# Altium PCB MACHIN1527.PcbDoc
Units mil, origin at the board's own origin, x right, y up, seen from the top; angles counter-clockwise.
Board outline 1897.64 x 1794.29 mil, 2 copper layers (Top Layer, Bottom Layer); 40 components, 0 nets, 94 pads, 12 vias.
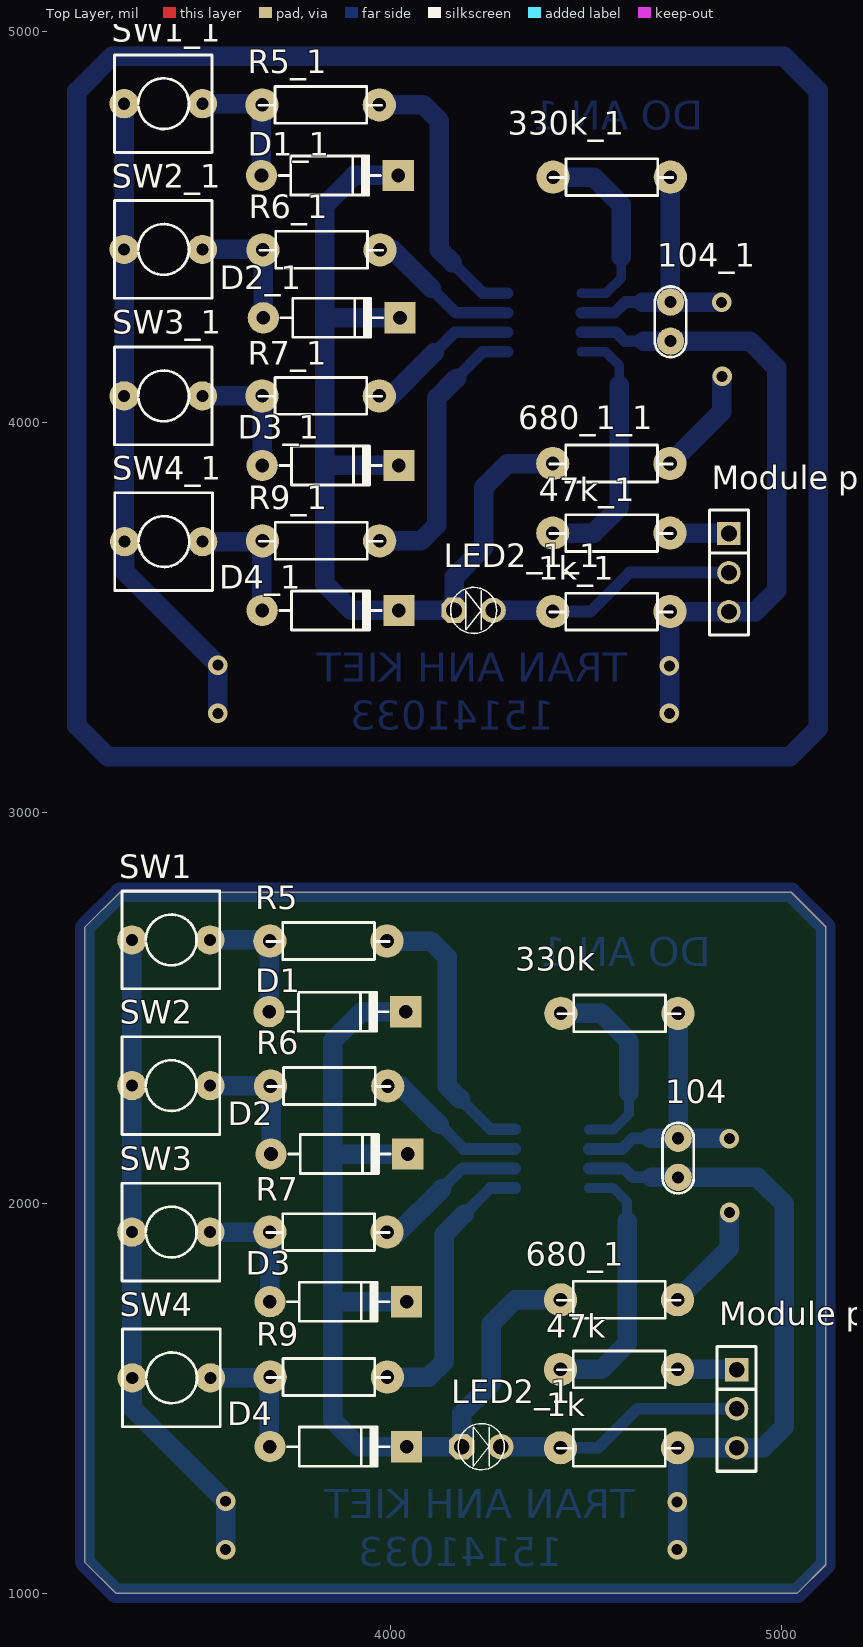
[diagram p0: Top Layer view]
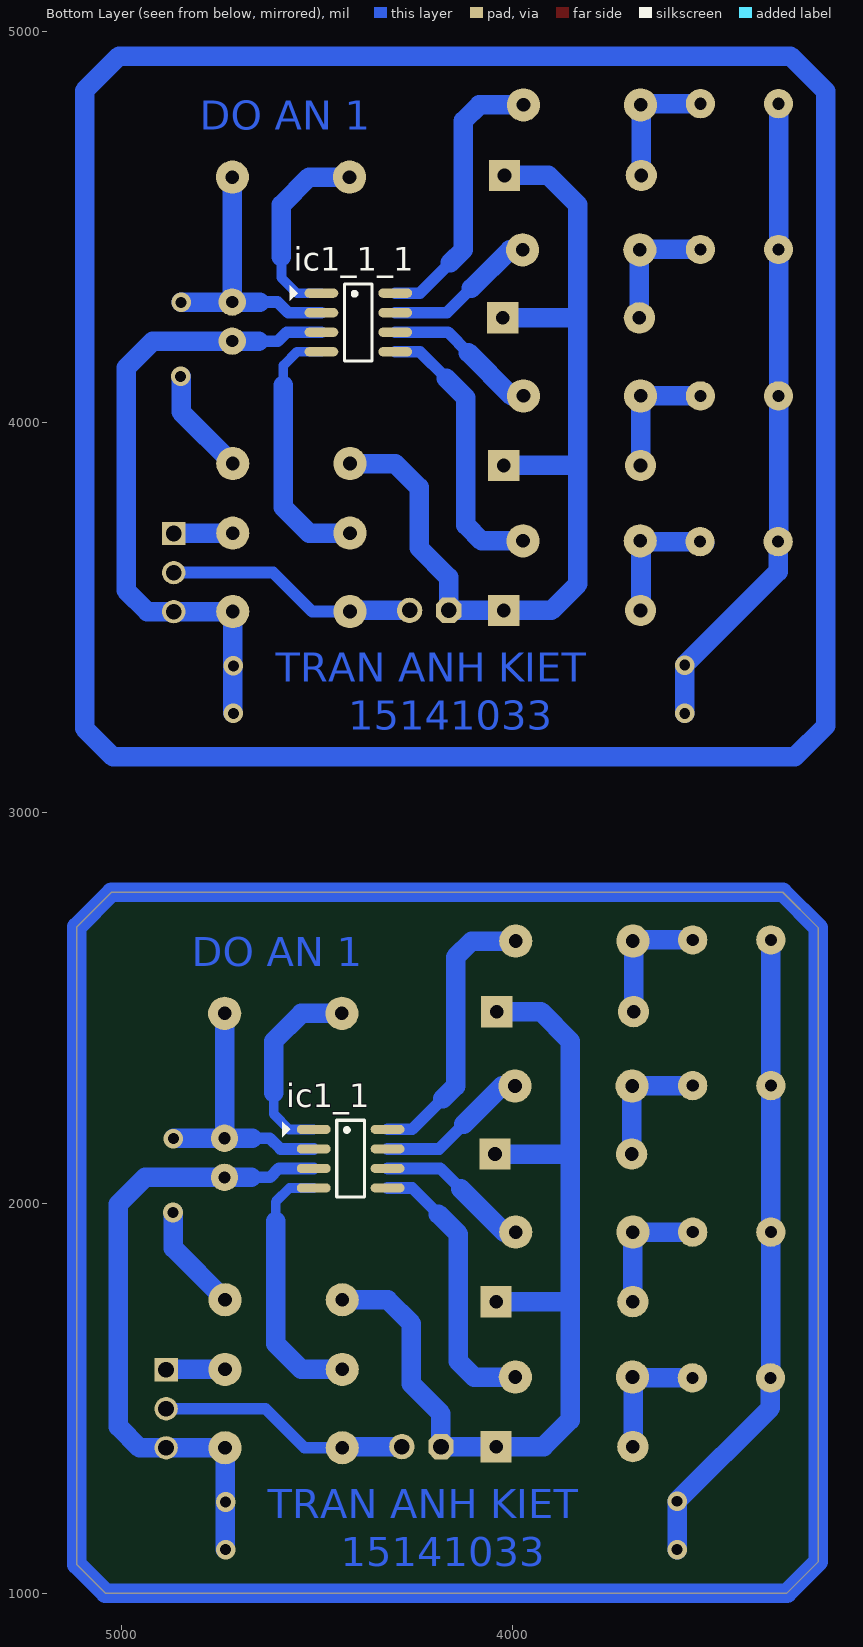
[diagram p1: Bottom Layer view, seen from below]

## Layer stack, top to bottom
Top Layer: signal copper 1.4
Dielectric: dielectric 12.6, FR-4, Dk 4.8
Bottom Layer: signal copper 1.4

## Board outline
3216.61,1081.97 3296.34,1002.24 5041.42,1002.24 5114.25,1075.08 5114.25,2707.95 5025.67,2796.54 3307.17,2796.54 3216.61,2705.98

## Design rules (kind name [scope] priority, off if disabled: settings)
Clearance [All] p1: gap=10
PolygonConnect [All] p1: connectstyle=Relief reliefconductorwidth=10 reliefentries=4 polygonreliefangle="90 Angle"
RoutingVias [All] p1: holewidth=28 width=50 viastyle="Through Hole" minholewidth=28 minwidth=50 maxholewidth=28 maxwidth=50
SilkscreenOverComponentPads [All] p1: minsilkscreentomaskgap=10
SolderMaskExpansion [All] p1: expansion=4
Width [All] p1: maxlimit=10 minlimit=10 preferedwidth=10
27 further rules are at their usual default settings.

## Components (designator, comment, footprint, x,y, rotation, side; value= is the part's Value field where it differs from the comment)
1k "Res" RES-1/4W-SMALL 4574.88,1374.29 r0 top
1k_1 "Res" RES-1/4W-SMALL 4555.2,3515.04 r0 top (schematic designator 1k)
47k "Res" RES-1/4W-SMALL 4574.88,1575.08 r0 top
47k_1 "Res" RES-1/4W-SMALL 4555.2,3715.83 r0 top (schematic designator 47k)
104 "104" CN1 4736.3,2166.61 r270 top
104_1 "104" CN1 4716.61,4307.36 r270 top (schematic designator 104)
330k "Res" RES-1/4W-SMALL 4575.87,2486.5 r0 top
330k_1 "Res" RES-1/4W-SMALL 4556.18,4627.24 r0 top (schematic designator 330k)
680_1 "Res" RES-1/4W-SMALL 4574.88,1753.23 r0 top (schematic designator 680)
680_1_1 "Res" RES-1/4W-SMALL 4555.2,3893.98 r0 top (schematic designator 680)
D1 "1N4007" D1A 3689.06,2490.83 r180 top
D1_1 "1N4007" D1A 3669.37,4631.58 r180 top (schematic designator D1)
D2 "1N4007" D1A 3693.98,2126.26 r180 top
D2_1 "1N4007" D1A 3674.29,4267.01 r180 top (schematic designator D2)
D3 "1N4007" D1A 3691.02,1748.31 r180 top
D3_1 "1N4007" D1A 3671.34,3889.06 r180 top (schematic designator D3)
D4 "1N4007" D1A 3691.02,1377.24 r180 top
D4_1 "1N4007" D1A 3671.34,3517.99 r180 top (schematic designator D4)
ic1_1 "ev1527" SO-8 4413.46,2114.45 r180 bottom (schematic designator ic1)
ic1_1_1 "ev1527" SO-8 4393.78,4255.2 r180 bottom (schematic designator ic1)
LED2_1 "LED" LED-3MM-YELLOW 4182.17,1377.24 r0 top (schematic designator LED2)
LED2_1_1 "LED" LED-3MM-YELLOW 4162.48,3517.99 r0 top (schematic designator LED2)
"Module phát" "JP3" JP3-C1T 4885.91,1574.09 r270 top
"Module phát_1" "JP3" JP3-C1T 4866.22,3714.84 r270 top (schematic designator "Module phát")
R5 "Res" RES-1/4W-SMALL 3830.79,2671.54 r0 top
R5_1 "Res" RES-1/4W-SMALL 3811.1,4812.28 r0 top (schematic designator R5)
R6 "Res" RES-1/4W-SMALL 3832.76,2300.47 r0 top
R6_1 "Res" RES-1/4W-SMALL 3813.07,4441.22 r0 top (schematic designator R6)
R7 "Res" RES-1/4W-SMALL 3830.79,1926.46 r0 top
R7_1 "Res" RES-1/4W-SMALL 3811.1,4067.2 r0 top (schematic designator R7)
R9 "Res" RES-1/4W-SMALL 3831.77,1555.39 r0 top
R9_1 "Res" RES-1/4W-SMALL 3812.09,3696.14 r0 top (schematic designator R9)
SW1 "" SW2 3537.7,2674.46 r180 top
SW1_1 "" SW2 3518.01,4815.21 r180 top (schematic designator SW1)
SW2 "" SW2 3537.7,2301.43 r180 top
SW2_1 "" SW2 3518.01,4442.18 r180 top (schematic designator SW2)
SW3 "" SW2 3537.7,1926.43 r180 top
SW3_1 "" SW2 3518.01,4067.18 r180 top (schematic designator SW3)
SW4 "" SW2 3538.68,1553.4 r180 top
SW4_1 "" SW2 3519,3694.15 r180 top (schematic designator SW4)

## Footprints (in the part's own frame and the unit in brackets; to place one, negate y for a bottom-side part, rotate by r counter-clockwise, add the part's x,y. Pads: shape width x height; smd on the part's side, far side on the other; paste and mask are expansions set on the pad)
CN1 [mil]
  round 70 hole 31: 1(0,0) 2(100,0)
  silkscreen extent -40,-40 141,40, body extent -60,-30 170,37, height 265
D1A [mil] "Diode 1A, W 100mil, L 350mil"
  round 80 hole 35: 1(0,0)
  rect 80x80 hole 35: 2(-350,0)
  silkscreen extent -305,-50 -45,50, body extent -386,-33 34,36, height 84
JP3-C1T [mm] "3 row, straight, gold plating"
  rect 1.52x1.52 hole 1.02: 1(0,0)
  round 1.52 hole 1.02: 2(2.54,0) 3(5.08,0)
  silkscreen extent -1.52,-1.27 6.6,1.27, body extent -1.52,-1.25 6.6,1.25, height 8.51
LED-3MM-YELLOW [mil]
  oct 65x65 hole 40: 1(0,0)
  round 65 hole 40: 2(100,0)
  silkscreen extent -9,-59 109,59, body extent -27,-77 117,80, height 181
RES-1/4W-SMALL [mil]
  round 85 hole 35: 1(-140,0) 2(160,0)
  silkscreen extent -148,-47 166,47, body extent -152,-47 172,47, height 97
SO-8 [mm] "8-Pin Small Outline Integrated Circuit 1.27 mm Pitch, IPC Medium Density"
  oval 2.2x0.6 smd: 1(-2.4,1.905) 2(-2.4,0.635) 3(-2.4,-0.635) 4(-2.4,-1.905) 5(2.4,-1.905) 6(2.4,-0.635) 7(2.4,0.635) 8(2.4,1.905)
  silkscreen extent -4.44,-2.5 0.9,2.5, body extent -2.93,-2.51 3.08,2.49, height 1.75
SW2 [mil] "SW button 2pin, 250x 250 mil"
  round 75 hole 31: 1(0,0) 2(200,0)
  silkscreen extent -25,-125 225,125

## Part data
104 104_1: library part CN1, "Cap np  1pF - 472pF"
D1 D1_1 D2 D2_1 D3 D3_1 D4 D4_1: library part D1A, "Diode 1A"
ic1_1 ic1_1_1: library part FDS4435A, "P-Channel Logic Level PowerTrench MOSFET"
LED2_1 LED2_1_1: "LED Single colour Green and Red"
"Module phát" "Module phát_1": "WR-PHD 2.54 mm Angled Socket Header"
SW1 SW1_1 SW2 SW2_1 SW3 SW3_1 SW4 SW4_1: library part SW2, "Switch button 2 pin"

## Via types
v1: diameter 50, hole 28, Top Layer to Bottom Layer, 12 vias

## Nets (pads, with @x,y where several pads share a name; then routed paths per layer and width w, separated by ;. In a path a pad name is that pad's centre, name@x,y a point inside that pad or via, vN(x,y) a via of type N, cw(c..) or ccw(c..) an arc to the next point about the centre after c; other vN are vias at no path point)
pads on no net: 1k.1 1k.2 1k_1.1 1k_1.2 47k.1 47k.2 47k_1.1 47k_1.2 104.1 104.2 104_1.1 104_1.2 330k.1 330k.2 330k_1.1 330k_1.2 680_1.1 680_1.2 680_1_1.1 680_1_1.2 "Module phát.1" "Module phát.2" "Module phát.3" "Module phát_1.1" "Module phát_1.2" "Module phát_1.3" D1.1 D1.2 D1_1.1 D1_1.2 D2.1 D2.2 D2_1.1 D2_1.2 D3.1 D3.2 D3_1.1 D3_1.2 D4.1 D4.2 D4_1.1 D4_1.2 ic1_1.1 ic1_1.2 ic1_1.3 ic1_1.4 ic1_1.5 ic1_1.6 ic1_1.7 ic1_1.8 ic1_1_1.1 ic1_1_1.2 ic1_1_1.3 ic1_1_1.4 ic1_1_1.5 ic1_1_1.6 ic1_1_1.7 ic1_1_1.8 LED2_1.1 LED2_1.2 LED2_1_1.1 LED2_1_1.2 R5.1 R5.2 R5_1.1 R5_1.2 R6.1 R6.2 R6_1.1 R6_1.2 R7.1 R7.2 R7_1.1 R7_1.2 R9.1 R9.2 R9_1.1 R9_1.2 SW1.1 SW1.2 SW1_1.1 SW1_1.2 SW2.1 SW2.2 SW2_1.1 SW2_1.2 SW3.1 SW3.2 SW3_1.1 SW3_1.2 SW4.1 SW4.2 SW4_1.1 SW4_1.2
copper on no net: | length 39163.2
  Bottom Layer w25: 4488.27,4180.2 4550.47,4180.2 4585.71,4144.96 4585.71,4094.76 ; 4488.27,4330.2 4551.46,4330.2 4590.63,4369.37 4590.63,4423.5 ; 4507.95,2039.45 4570.16,2039.45 4605.39,2004.21 4605.39,1954.02 ; 4507.95,2189.45 4571.14,2189.45 4610.32,2228.62 4610.32,2282.76
  Bottom Layer w30: 4104.41,4342.8 4167.01,4280.2 4299.29,4280.2 ; 4111.79,4177.93 4164.06,4230.2 4299.29,4230.2 ; 4124.09,2202.05 4186.69,2139.45 4318.98,2139.45 ; 4131.48,2037.18 4183.74,2089.45 4318.98,2089.45 ; 4158.05,4408.25 4236.1,4330.2 4299.29,4330.2 ; 4168.88,4112.97 4236.1,4180.2 4299.29,4180.2 ; 4177.74,2267.5 4255.79,2189.45 4318.98,2189.45 ; 4188.56,1972.22 4255.79,2039.45 4318.98,2039.45 ; 4383.7,3515.04 4415.2,3515.04 4511.89,3515.04 4611.69,3614.84 4866.22,3614.84 ; 4403.38,1374.29 4434.88,1374.29 4531.57,1374.29 4631.37,1474.09 4885.91,1474.09 ; 4488.27,4230.2 4577.24,4230.2 4600.08,4207.36 4648.7,4207.36 ; 4488.27,4280.2 4573.31,4280.2 4600.47,4307.36 4645.75,4307.36 ; 4507.95,2089.45 4596.93,2089.45 4619.76,2066.61 4668.39,2066.61 ; 4507.95,2139.45 4592.99,2139.45 4620.16,2166.61 4665.43,2166.61
  Bottom Layer w50: 3318.01,3695.13 3318.01,4067.18 3318.01,4442.18 3318.01,4815.21 ; 3319,3694.15 3319,3617.38 v1(3558.15,3378.23) v1(3558.15,3254.21) ; 3337.7,1554.38 3337.7,1926.43 3337.7,2301.43 3337.7,2674.46 ; 3338.68,1553.4 3338.68,1476.63 v1(3577.83,1237.48) v1(3577.83,1113.46) ; 3506.97,3690.24 3507.95,3689.25 ; 3518.01,4067.18 3671.08,4067.18 3671.1,3889.29 ; 3518.01,4442.18 3672.11,4442.18 3673.07,4441.22 3674.29,4440 3674.29,4267.01 ; 3518.01,4815.21 3668.18,4815.21 3669.37,4814.02 3669.37,4631.58 ; 3519,3694.15 3670.09,3694.15 3670.09,3519.24 ; 3526.65,1549.49 3527.64,1548.5 ; 3537.7,1926.43 3690.76,1926.43 ; 3537.7,2301.43 3691.8,2301.43 3692.76,2300.47 3693.98,2299.25 3693.98,2126.26 ; 3537.7,2674.46 3687.86,2674.46 3689.06,2673.27 3689.06,2490.83 ; 3538.68,1553.4 3689.78,1553.4 3689.78,1378.49 ; 3690.79,1748.54 3690.79,1926.46 ; 3833.74,4267.01 4024.29,4267.01 ; 3835.71,3889.06 4021.34,3889.06 ; 3853.43,2126.26 4043.98,2126.26 ; 3855.39,1748.31 4041.02,1748.31 ; 3971.1,4067.2 4001.06,4067.2 4111.79,4177.93 ; 3971.1,4812.28 4083.74,4812.28 4125.08,4770.94 4125.08,4441.22 4158.05,4408.25 ; 3972.09,3696.14 4077.83,3696.14 4118.19,3736.5 4118.19,4062.28 4168.88,4112.97 ; 3973.07,4441.22 4005.98,4441.22 4104.41,4342.8 ; 3990.79,1926.46 4020.75,1926.46 4131.48,2037.18 ; 3990.79,2671.54 4103.43,2671.54 4144.76,2630.2 4144.76,2300.47 4177.74,2267.5 ; 3991.77,1555.39 4097.52,1555.39 4137.87,1595.75 4137.87,1921.54 4188.56,1972.22 ; 3992.76,2300.47 4025.67,2300.47 4124.09,2202.05 ; 4019.37,4631.58 3906.97,4631.58 3831.77,4556.38 3831.77,3585.91 3899.69,3517.99 4021.34,3517.99 4162.48,3517.99 4162.48,3602.64 4238.27,3678.43 4238.27,3832.95 4299.29,3893.98 4415.2,3893.98 ; 4039.06,2490.83 3926.66,2490.83 3851.46,2415.63 3851.46,1445.16 3919.37,1377.24 4041.02,1377.24 4182.17,1377.24 4182.17,1461.89 4257.95,1537.68 4257.95,1692.2 4318.98,1753.23 4434.88,1753.23 ; 4262.48,3517.99 4414.21,3517.99 ; 4282.17,1377.24 4433.9,1377.24 ; 4415.2,3715.83 4519.76,3715.83 4585.71,3781.77 4585.71,4094.76 ; 4416.18,4627.24 4519.76,4627.24 4590.63,4556.38 4590.63,4423.5 ; 4434.88,1575.08 4539.45,1575.08 4605.39,1641.02 4605.39,1954.02 ; 4435.87,2486.5 4539.45,2486.5 4610.32,2415.63 4610.32,2282.76 ; 4645.75,4307.36 4716.61,4307.36 v1@4846.54,4307.36 ; 4648.7,4207.36 4716.61,4207.36 4919.96,4207.36 4988.27,4139.06 4988.27,3569.17 4934.13,3515.04 4715.2,3515.04 v1@4715.2,3255.75 ; 4665.43,2166.61 4736.3,2166.61 v1@4866.22,2166.61 ; 4668.39,2066.61 4736.3,2066.61 4939.65,2066.61 5007.95,1998.31 5007.95,1428.43 4953.82,1374.29 4734.88,1374.29 v1@4734.88,1115 ; 4715.2,3715.83 4865.24,3715.83 ; 4715.2,3893.98 4847.52,4026.3 ; 4716.18,4307.8 4716.18,4627.24 ; 4734.88,1575.08 4884.92,1575.08 ; 4734.88,1753.23 4867.2,1885.55 ; 4735.87,2167.05 4735.87,2486.5 ; v1@4847.52,4098.7 4847.52,4026.3 ; v1@4847.52,4116.42 4847.52,4026.3 ; v1@4867.2,1957.95 4867.2,1885.55 ; v1@4867.2,1975.67 4867.2,1885.55 ; 3196.93,3222.72 3276.65,3142.99 5021.73,3142.99 5094.57,3215.83 5094.57,4848.7 5005.98,4937.28 3287.48,4937.28 3196.93,4846.73 3196.93,3222.72 ; 3216.61,1081.97 3216.61,2705.98 3307.17,2796.54 5025.67,2796.54 5114.25,2707.95 5114.25,1075.08 5041.42,1002.24 3296.34,1002.24 3216.61,1081.97
  other v1: 4733.35,1113.46 4733.35,1235.51 4868.19,1976.65 4867.2,2165.63 4713.66,3254.21 4713.66,3376.26 4848.5,4117.4 4847.52,4306.38

## Other copper
Bottom Layer:
  text "DO AN 1" at 4800.28,4748.31 h75
  text "TRAN ANH KIET" at 4605.39,3334.92 h75
  text "15141033" at 4419.37,3211.89 h75
  text "DO AN 1" at 4819.96,2607.56 h75
  text "TRAN ANH KIET" at 4625.08,1194.17 h75
  text "15141033" at 4439.06,1071.14 h75